# Altium PCB STM32.PcbDoc
Units mm, origin at the board's own origin, x right, y up, seen from the top; angles counter-clockwise.
Board outline 38.5 x 33.5 mm, 4 copper layers (Top Layer, L1(GND), Int2 (PWR), Bottom Layer), stack 1.482 mm thick; 35 components, 27 nets, 169 pads, 39 vias.
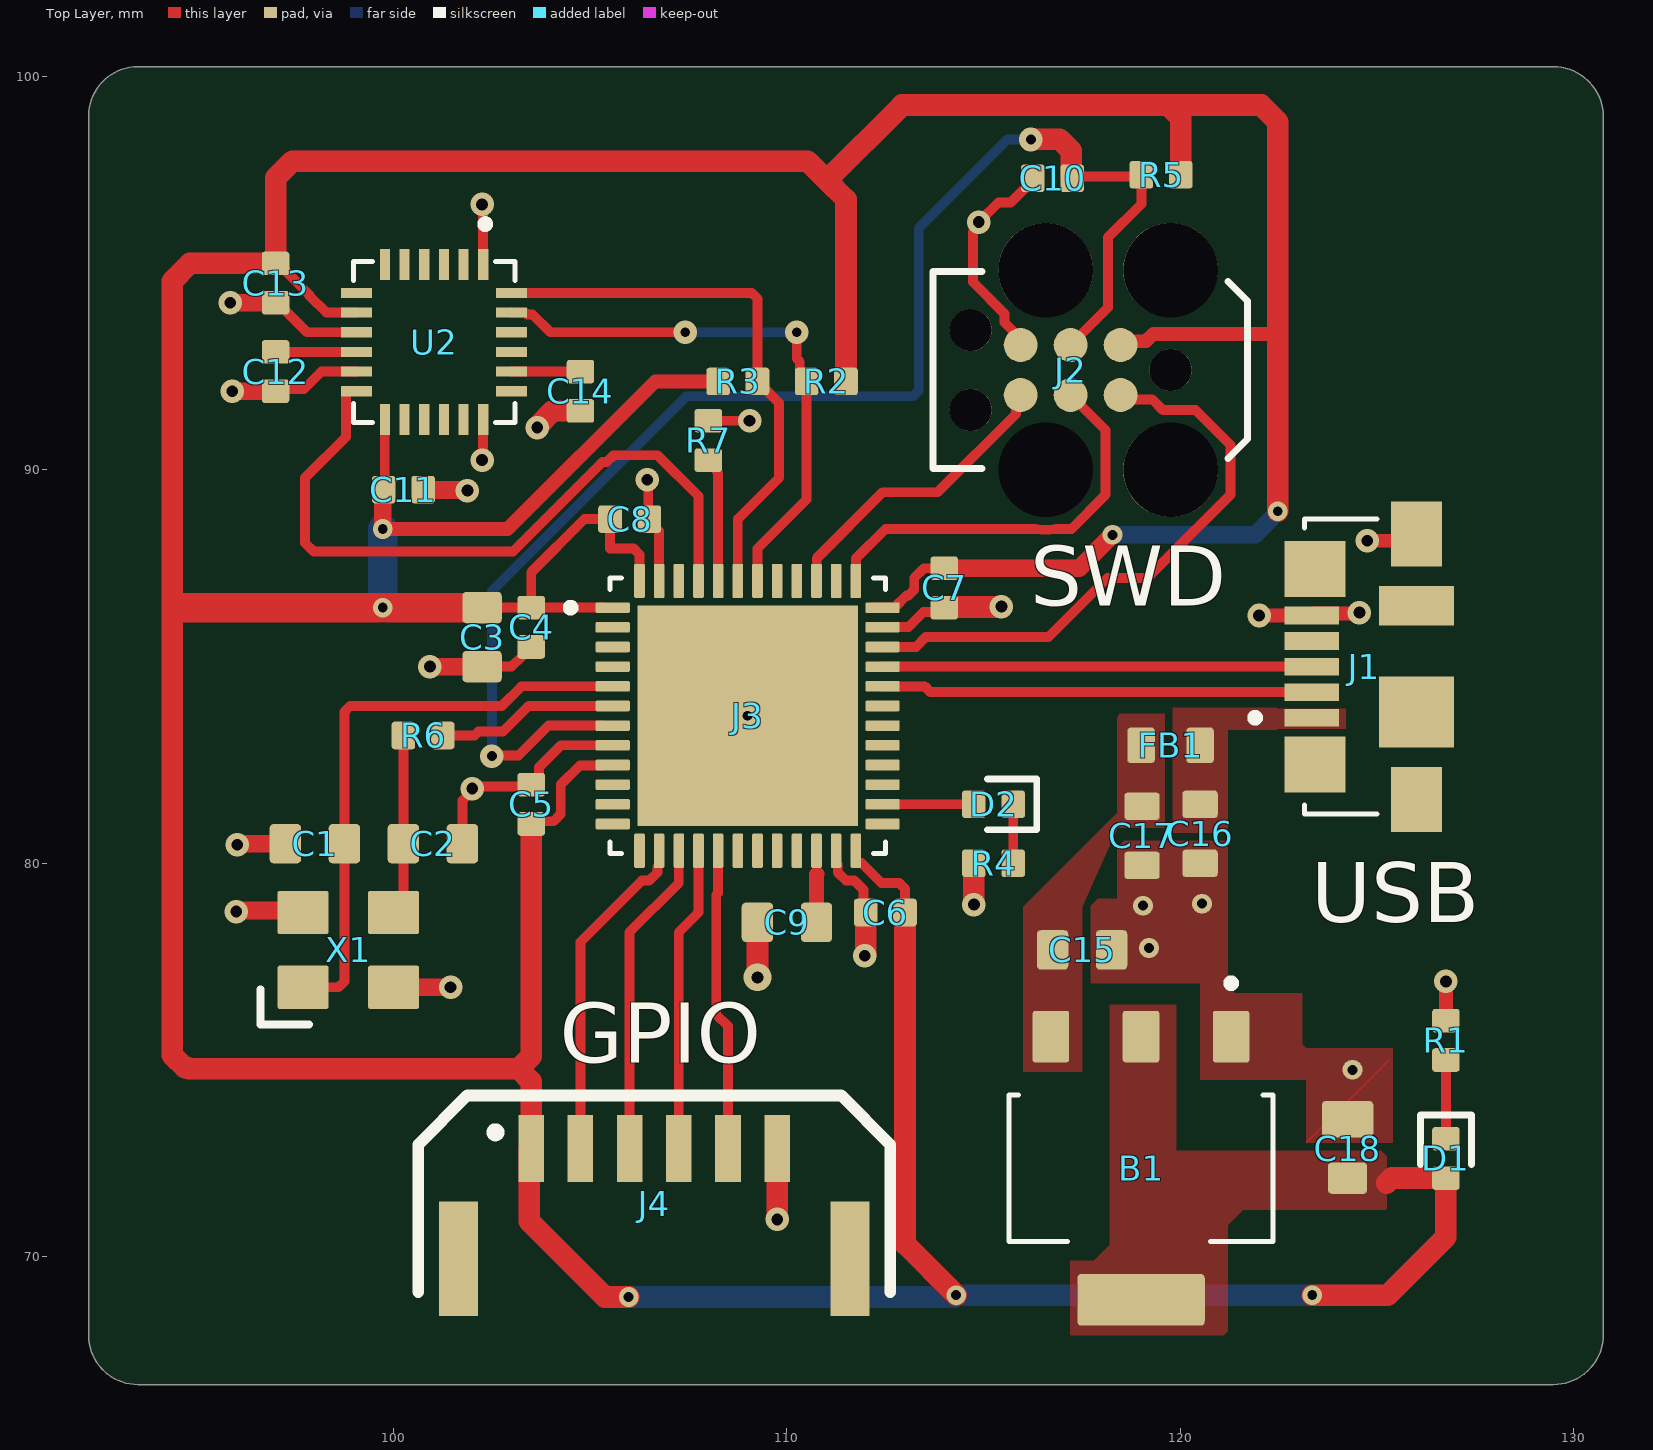
[diagram p0: Top Layer view]
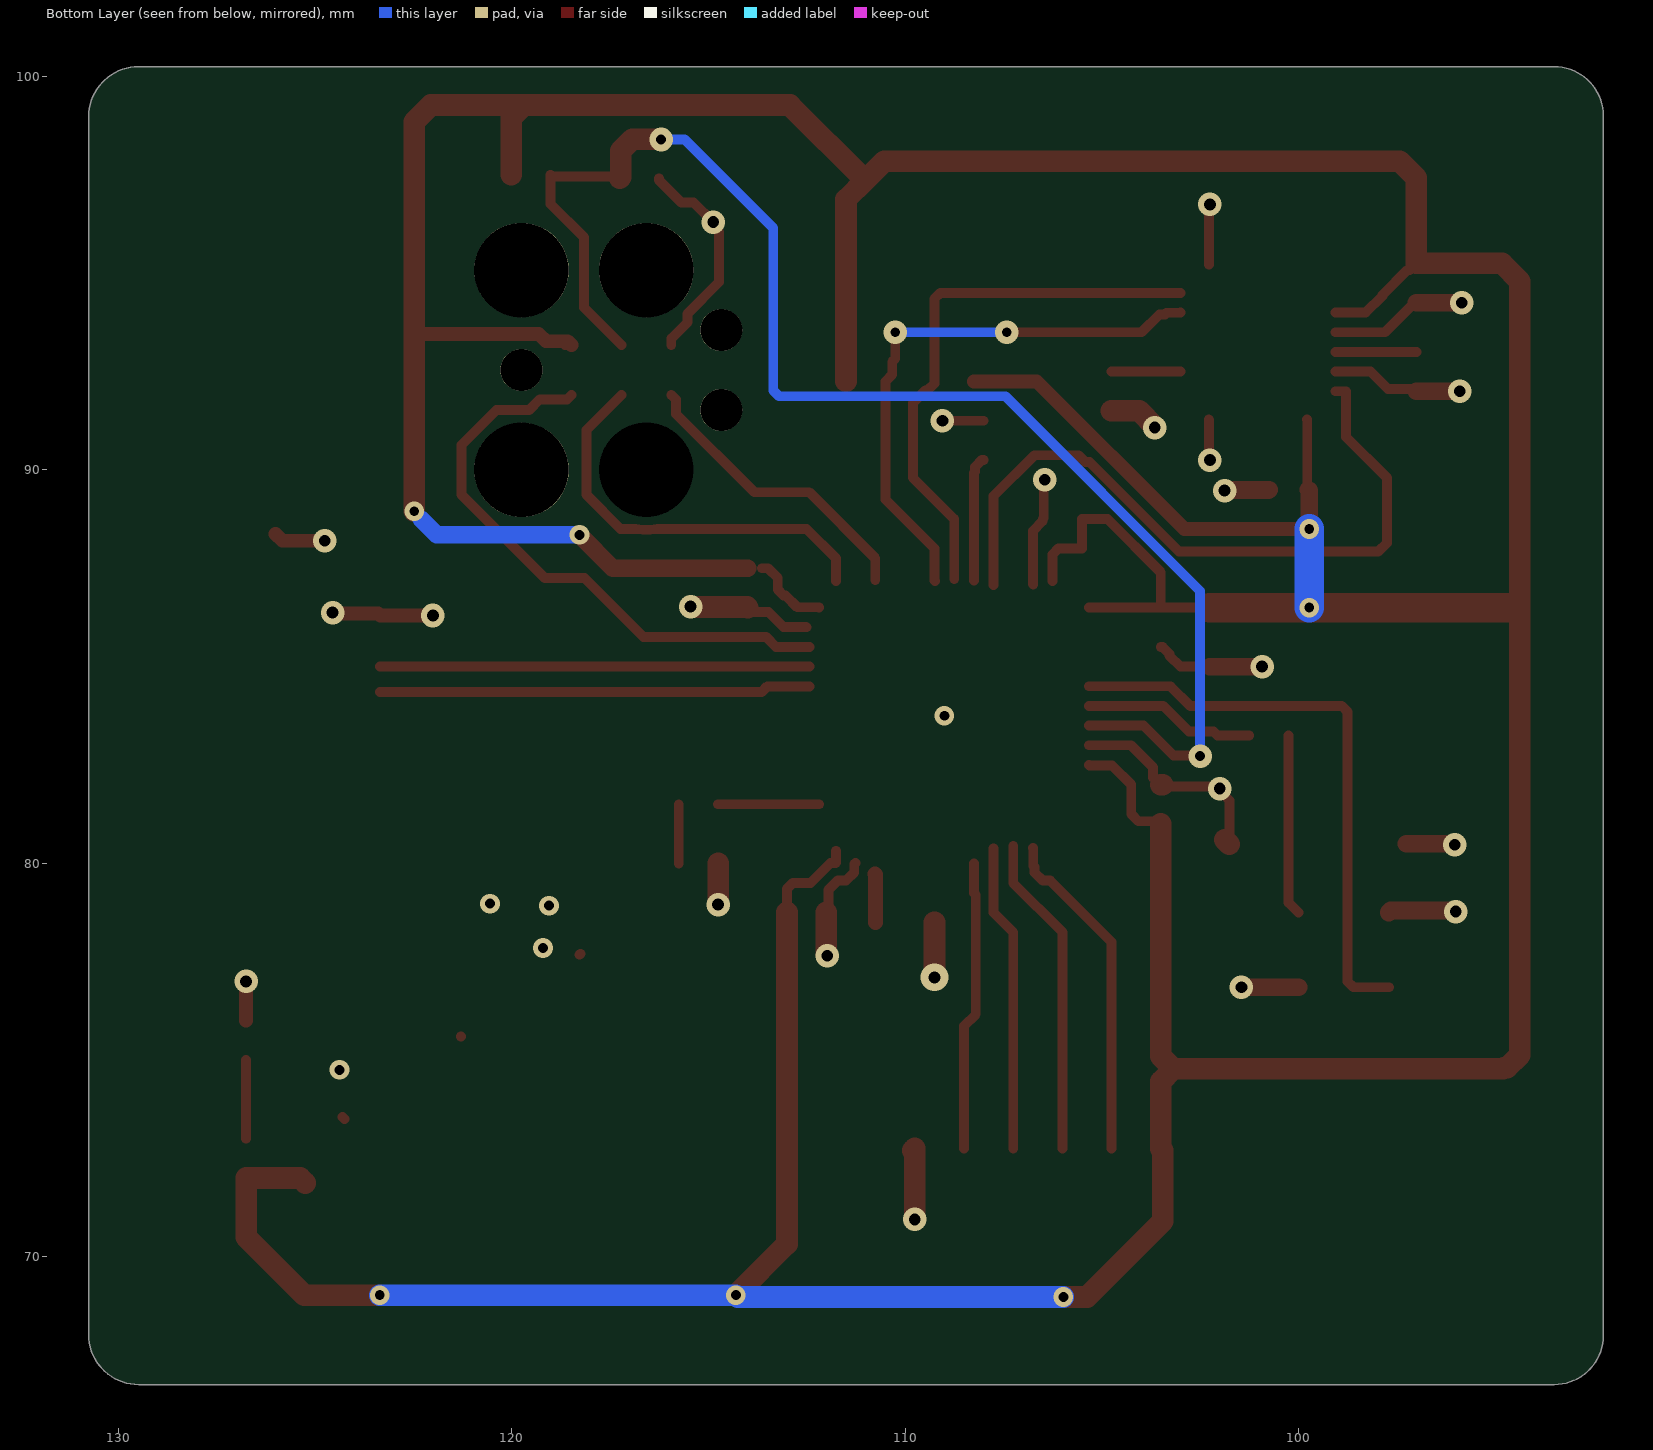
[diagram p1: Bottom Layer view, seen from below]
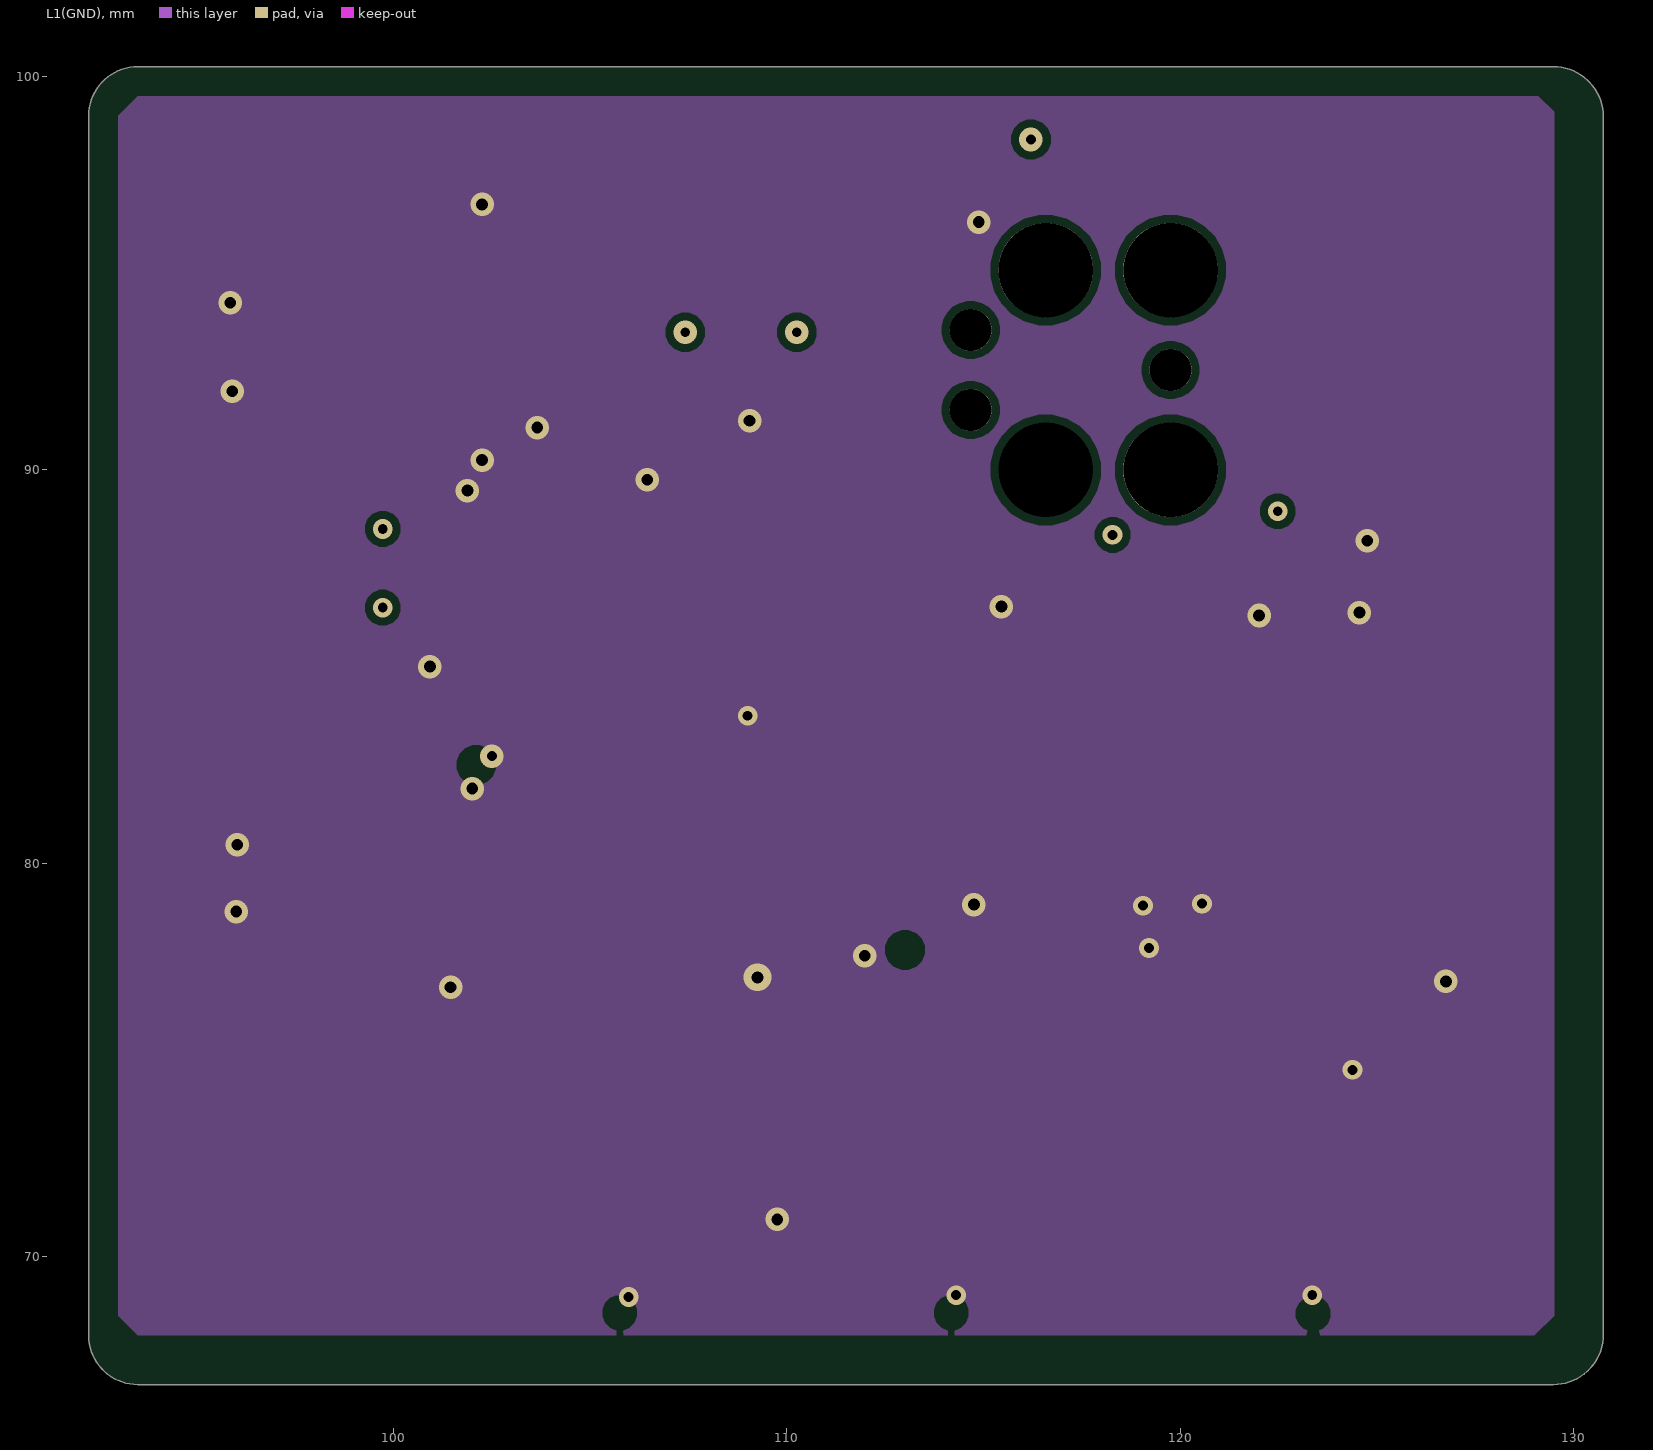
[diagram p2: L1(GND)]
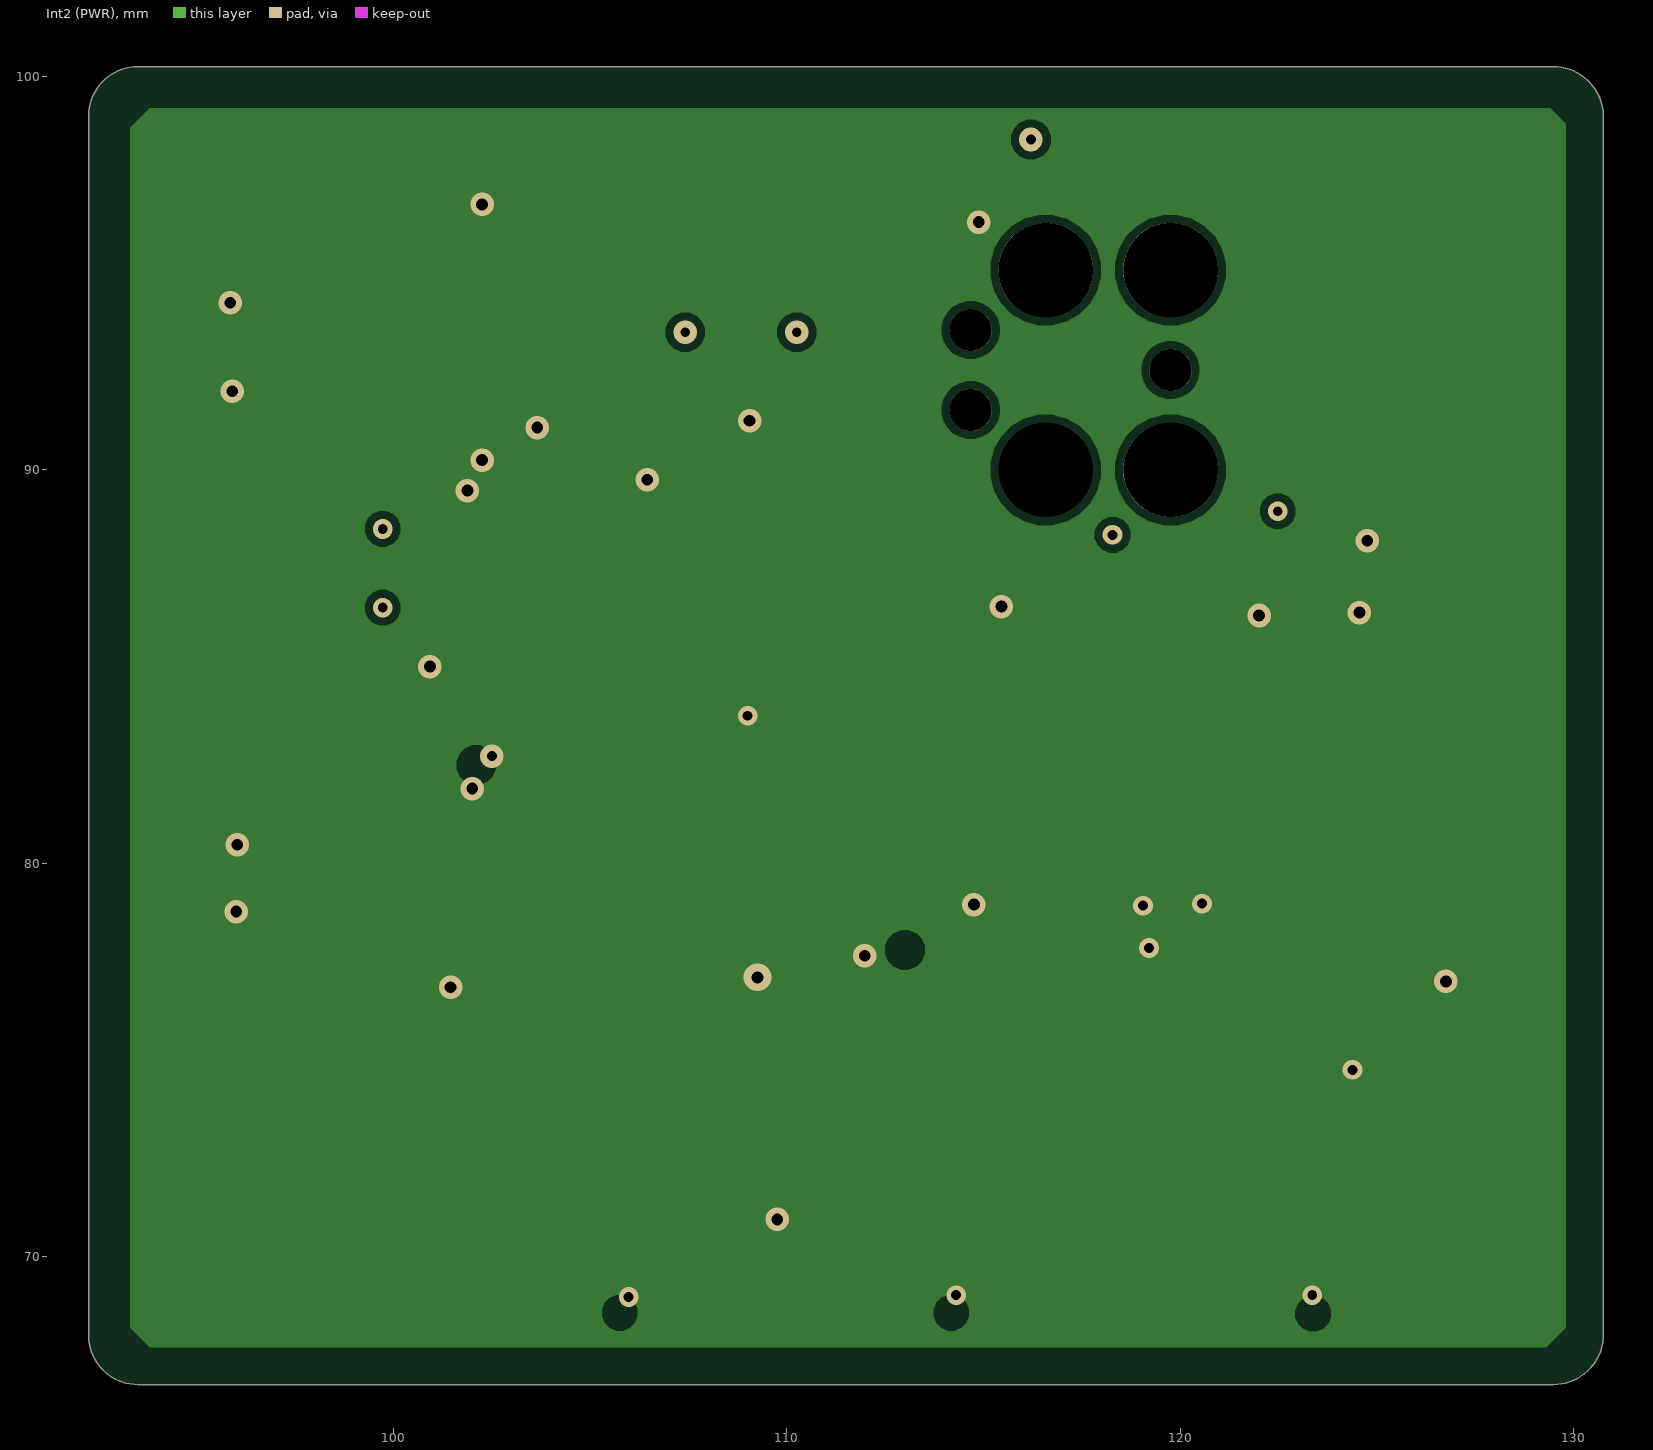
[diagram p3: Int2 (PWR)]
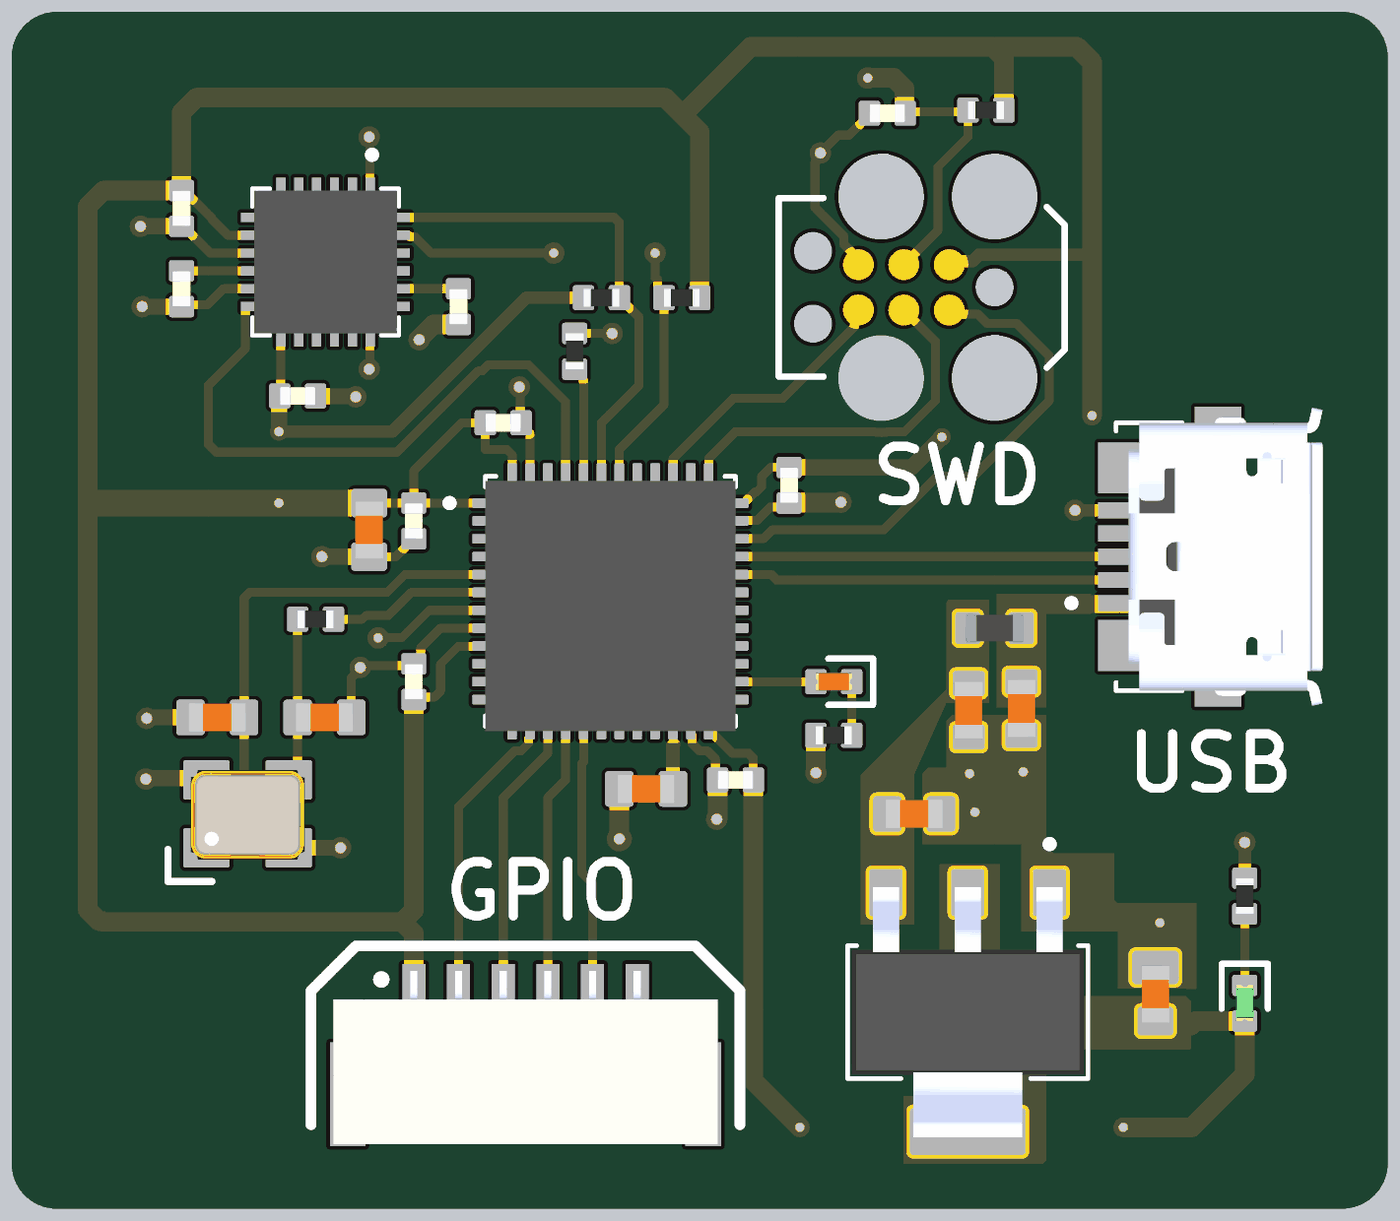
[diagram p4: 3D render of the assembled board from above, using the file's embedded part models]

## Layer stack, top to bottom
Top Solder: solder mask 0.0254, SM-001, Dk 4
Top Layer: signal copper 0.035
Dielectric 6: prepreg 0.0711, PP-006, Dk 4.1
Dielectric 1: prepreg 0.1295, PP-017, Dk 4.3
Dielectric 2: prepreg 0.1295, PP-017, Dk 4.3
L1(GND): signal copper 0.02
Dielectric 3: core 0.7112, Core-039, Dk 4.8
Int2 (PWR): signal copper 0.02
Dielectric 4: prepreg 0.1295, PP-017, Dk 4.3
Dielectric 5: prepreg 0.1295, PP-017, Dk 4.3
Dielectric 7: prepreg 0.0711, PP-006, Dk 4.1
Bottom Layer: signal copper 0.035
Bottom Solder: solder mask 0.0254, SM-001, Dk 4

## Board outline
92.25,68 ccw(c93.5,68) 93.5,66.75 129.48,66.75 ccw(c129.48,68.02) 130.75,68.02 130.75,98.98 ccw(c129.48,98.98) 129.48,100.25 93.5,100.25 ccw(c93.5,99) 92.25,99

## Design rules (kind name [scope] priority, off if disabled: settings)
Clearance [All] p1: gap=0.005 ignorepadtopadclearanceinfootprint=FALSE except(0: Arc-Hole Track-Hole SMDPad-Hole THPad-Hole Via-Hole Fill-Hole Poly-Hole Region-Hole Text-Hole)
DiffPairsRouting [All] p1: maxlimit=0.254 minlimit=0.254 mostfreqgap=0.254 toplayer_minwidth=0.381 toplayer_maxwidth=0.381 toplayer_prefwidth=0.381 midlayer1_minwidth=0.381 midlayer1_maxwidth=0.381 midlayer1_prefwidth=0.381 midlayer2_minwidth=0.381 midlayer2_maxwidth=0.381 midlayer2_prefwidth=0.381 bottomlayer_minwidth=0.381 bottomlayer_maxwidth=0.381 bottomlayer_prefwidth=0.381 maxuncoupledlength=12.7
PolygonConnect [All] p1: connectstyle=Direct reliefconductorwidth=0.254 reliefentries=4 polygonreliefangle="90 Angle" airgapwidth=0.254
RoutingVias [All] p1: holewidth=0.3 width=0.7 viastyle="Through Hole" minholewidth=0.25 minwidth=0.55 maxholewidth=0.4 maxwidth=0.9
SolderMaskExpansion [All] p1: expansion=0.102 istentingtop=FALSE
UnRoutedNet [All] p1: checkbadconnections=TRUE
Width [All] p1: maxlimit=1 minlimit=0.2 preferedwidth=0.3 midlayer1_prefwidth=0.254 midlayer2_prefwidth=0.254 minimp=50.000000 maximp=50.000000 favimp=50.000000
28 further rules are at their usual default settings.

## Classes and differential pairs
differential pair USB_D: +USB_D_P -USB_D_N

## Components (designator, comment, footprint, x,y, rotation, side; value= is the part's Value field where it differs from the comment)
B1 "AMS1117" SOT229P700X180-4N 119,72.25 r270 top
C1 "10p" CAP_0603#1 98,80.5 r0 top
C2 "10p" CAP_0603#1 101,80.5 r180 top
C3 "2.2u" CAP_0603#1 102.25,85.75 r90 top
C4 "100n" CAP_0402 103.5,86 r90 top
C5 "100n" CAP_0402 103.5,81.5 r270 top
C6 "100n" CAP_0402 112.5,78.75 r0 top
C7 "100n" CAP_0402 114,87 r90 top
C8 "100n" CAP_0402 106,88.75 r180 top
C9 "2.2u" CAP_0603#1 110,78.5 r0 top
C10 "100n" CAP_0402 116.75,97.415 r0 top
C11 "100n" CAP_0402 100.25,89.5 r180 top
C12 "100n" CAP_0402 97,92.5 r90 top
C13 "10n" CAP_0402 97,94.75 r90 top
C14 "2.2n" CAP_0402 104.75,92 r90 top
C15 "22u" CAP_0603#1 117.5,77.8 r180 top
C16 "2.2u" CAP_0603#2 120.5,80.75 r90 top
C17 "2.2u" CAP_0603#2 119.025,80.7 r90 top
C18 "22u" CAP_0603#3 124.25,72.75 r270 top
D1 "GREEN" LED_0402_GREEN 126.75,72.5 r90 top
D2 "RED" LED_0402_RED 115.25,81.5 r0 top
FB1 "120R" FB_0603 119.75,83 r180 top
J1 "" MOLEX_47346-0001 126,85 r90 top
J2 "TC2030" TC2030-FP 117.21,92.54 r180 top
J3 "STM32F411CEU6" QFN50P700X700X60-49N 109,83.75 r0 top
J4 "SM06B-GHS-TB" SM06B-GHS-TB 106.625,71.35 r0 top
R1 "1k" RES_0402 126.75,75.5 r270 top
R2 "2.2k" RES_0402 111,92.25 r180 top
R3 "2.2k" RES_0402 108.75,92.25 r0 top
R4 "1k" RES_0402 115.25,80 r0 top
R5 "10k" RES_0402 119.508,97.501 r180 top
R6 "0R" RES_0402 100.75,83.25 r0 top
R7 "10k" RES_0402 108,90.75 r90 top
U2 "" QFN50P400X400X95-24N 101.03,93.25 r270 top
X1 "24MHz" XTAL_3225 98.85,77.8 r0 top

## Footprints (in the part's own frame and the unit in brackets; to place one, negate y for a bottom-side part, rotate by r counter-clockwise, add the part's x,y. Pads: shape width x height; smd on the part's side, far side on the other; paste and mask are expansions set on the pad)
CAP_0402 [mm]
  rrect25% 0.6x0.7 smd: 1(-0.5,0) 2(0.5,0)
  body extent -0.5,-0.26 0.5,0.26, height 0.37
CAP_0603#1 [mm]
  rrect25% 0.8x1 smd: 1(-0.75,0) 2(0.75,0)
  body extent -0.8,-0.4 0.8,0.4, height 0.51
CAP_0603#2 [mm]
  rrect25% 0.7x0.9 smd: 1(-0.75,0) 2(0.75,0)
  body extent -0.8,-0.4 0.8,0.4, height 0.51
CAP_0603#3 [mm]
  rrect25% 0.93x1.31 smd: 1(-0.75,0)
  rrect25% 0.8x1 smd: 2(0.75,0)
  body extent -0.8,-0.4 0.8,0.4, height 0.51
FB_0603 [mm]
  rrect25% 0.7x0.9 smd: 1(-0.75,0) 2(0.75,0)
  body extent -0.8,-0.4 0.8,0.4, height 0.81
LED_0402_GREEN [mm]
  rrect25% 0.6x0.7 smd: A(-0.5,0) K(0.5,0)
  silkscreen extent -0.15,-0.65 1.1,0.65, body extent -0.51,-0.25 0.51,0.25, height 0.45
LED_0402_RED [mm]
  rrect25% 0.6x0.7 smd: A(-0.5,0) K(0.5,0)
  silkscreen extent -0.15,-0.65 1.1,0.65, body extent -0.51,-0.25 0.51,0.25, height 0.45
MOLEX_47346-0001 [mm]
  rect 0.45x1.38 smd: 1(-1.3,2.66) 2(-0.65,2.66) 3(0,2.66) 4(0.65,2.66) 5(1.3,2.66)
  rect 1.425x1.55 smd: S1(-2.488,2.575) S2(2.488,2.575)
  rect 1.65x1.3 smd: S3(-3.375,0) S6(3.375,0)
  rect 1.8x1.9 smd: S4(-1.15,0)
  rect 1x1.9 smd: S5(1.55,0)
  silkscreen extent -3.75,1 3.75,4.2, body extent -4.18,-2.93 4.18,2.5, height 2.7
QFN50P400X400X95-24N [mm]
  rect 0.79x0.26 smd: 1(-1.97,1.25) 2(-1.97,0.75) 3(-1.97,0.25) 4(-1.97,-0.25) 5(-1.97,-0.75) 6(-1.97,-1.25) 13(1.97,-1.25) 14(1.97,-0.75) 15(1.97,-0.25) 16(1.97,0.25) 17(1.97,0.75) 18(1.97,1.25)
  rect 0.26x0.79 smd: 7(-1.25,-1.97) 8(-0.75,-1.97) 9(-0.25,-1.97) 10(0.25,-1.97) 11(0.75,-1.97) 12(1.25,-1.97) 19(1.25,1.97) 20(0.75,1.97) 21(0.25,1.97) 22(-0.25,1.97) 23(-0.75,1.97) 24(-1.25,1.97)
  silkscreen extent -3.1,-2.05 2.05,2.05, body extent -2,-2 2,2, height 0.93
QFN50P700X700X60-49N [mm]
  rrect25% 0.87x0.27 smd: 1(-3.43,2.75) 2(-3.43,2.25) 3(-3.43,1.75) 4(-3.43,1.25) 5(-3.43,0.75) 6(-3.43,0.25) 7(-3.43,-0.25) 8(-3.43,-0.75) 9(-3.43,-1.25) 10(-3.43,-1.75) 11(-3.43,-2.25) 12(-3.43,-2.75) 25(3.43,-2.75) 26(3.43,-2.25) 27(3.43,-1.75) 28(3.43,-1.25) 29(3.43,-0.75) 30(3.43,-0.25) 31(3.43,0.25) 32(3.43,0.75) 33(3.43,1.25) 34(3.43,1.75) 35(3.43,2.25) 36(3.43,2.75)
  rrect25% 0.27x0.87 smd: 13(-2.75,-3.43) 14(-2.25,-3.43) 15(-1.75,-3.43) 16(-1.25,-3.43) 17(-0.75,-3.43) 18(-0.25,-3.43) 19(0.25,-3.43) 20(0.75,-3.43) 21(1.25,-3.43) 22(1.75,-3.43) 23(2.25,-3.43) 24(2.75,-3.43) 37(2.75,3.43) 38(2.25,3.43) 39(1.75,3.43) 40(1.25,3.43) 41(0.75,3.43) 42(0.25,3.43) 43(-0.25,3.43) 44(-0.75,3.43) 45(-1.25,3.43) 46(-1.75,3.43) 47(-2.25,3.43) 48(-2.75,3.43)
  rect 5.6x5.6 smd paste-4: 49(0,0)
  silkscreen extent -4.6,-3.5 3.5,3.5, body extent -3.5,-3.63 3.5,3.37, height 0.6
RES_0402 [mm]
  rrect25% 0.6x0.7 smd: 1(-0.5,0) 2(0.5,0)
  body extent -0.5,-0.25 0.5,0.25, height 0.3
SM06B-GHS-TB [mm]
  rect 0.65x1.7 smd: 1(-3.125,1.4) 2(-1.875,1.4) 3(-0.625,1.4) 4(0.625,1.4) 5(1.875,1.4) 6(3.125,1.4)
  rect 1x2.9 smd: ""(-4.975,-1.4) ""(4.975,-1.4)
  silkscreen extent -6,-2.25 6,2.75, body extent -5.38,-2.8 5.38,2.05, height 4.26
SOT229P700X180-4N [mm]
  rrect15% 1.31x0.93 smd: 1(-3.345,2.29) 2(-3.345,0) 3(-3.345,-2.29)
  rrect15% 1.31x3.24 smd: 4(3.345,0)
  silkscreen extent -4.8,-3.36 1.86,3.36, body extent -3.5,-3.25 3.5,3.25, height 1.8
TC2030-FP [mm]
  round 0.863 smd paste-0.432: 1(-1.27,-0.635) 2(-1.27,0.635) 3(0,-0.635) 4(0,0.635) 5(1.27,-0.635) 6(1.27,0.635)
  round 2.4 hole 2.4 unplated: MH(-2.54,2.54) MH(-2.54,-2.54) MH(0.635,-2.54)
  round 1.067 hole 1.067 unplated: MH(-2.54,0) MH(2.54,-1.016) MH(2.54,1.016)
  round 1.2 hole 2.4 unplated: MH(0.635,2.54)
  silkscreen extent -4.5,-2.5 3.5,2.5
XTAL_3225 [mm]
  rrect10% 1.3x1.1 smd: 1(-1.15,-0.95) 2(1.15,-0.95) 3(1.15,0.95) 4(-1.15,0.95)
  silkscreen extent -2.23,-1.89 -1,-1, body extent -1.6,-1.28 1.6,1.22, height 0.61

## Part data
B1: "1117", Manufacturer_Name="Advanced Monolithic Systems", Datasheet Link=https://datasheet.lcsc.com/szlcsc/Advanced-Monolithic-Systems-AMS-AMS1117-ADJ_C6188.pdf, Geometry.Height=1.8mm, Manufacturer_Part_Number=AMS1117
C1 C2 C3 C9 C15 C16 C17 C18: library part CAP_0603, "Capacitor SMD 0603"
C4 C5 C6 C7 C8 C10 C11 C12 C13 C14: library part CAP_0402, "Capacitor SMD 0402"
D1: library part LED_0402_GREEN, "LED 0402 GREEN SMD"
D2: library part LED_0402_RED, "LED 0402 RED SMD"
FB1: library part FB_0603, "Ferrite Bead SMD 0603"
J1: library part 47346-0001, "USB - micro B USB 2.0 Receptacle Connector 5 Position Surface Mount, Right Angle", Package=None, Availability="In Stock", Check_prices=https://www.snapeda.com/parts/47346-0001/Molex/view-part/?ref=eda, MF=Molex, MP=47346-0001, Price=None, Purchase-URL=https://pricing.snapeda.com/search/part/47346-0001/?ref=eda, SnapEDA_Link=https://www.snapeda.com/parts/47346-0001/Molex/view-part/?ref=snap
J2: "Tag-Connect No-Solder SWD Debug Connector DO NOT PLACE", Manufacturer=Tag-Connect, Manufacturer Part Number=TC2030
J3: library part STM32F411VET6, "IC MCU 32BIT 512KB FLASH 100LQFP", Case/Package=LQFP, Manufacturer=STMicroelectronics, Max Frequency=100MHz, Max Operating Temperature=85°C, Max Power Dissipation=465mW, Max Supply Voltage=3.6V, Min Operating Temperature=-40°C, Min Supply Voltage=1.7V, Operating Supply Voltage=3.3V, Package Quantity=540, Category=Microcontrollers, ComponentLink1Description=http://www.farnell.com/datasheets/2281762.pdf?src-supplier=Farnell, ComponentLink1URL=http://www.farnell.com/datasheets/2281762.pdf?src-supplier=Farnell, ComponentLink2Description=http://www.mouser.com/ds/2/389/stm32f411ce-956237.pdf?src-supplier=Mouser, ComponentLink2URL=http://www.mouser.com/ds/2/389/stm32f411ce-956237.pdf?src-supplier=Mouser, ComponentLink3Description=http://www.st.com/content/ccc/resource/technical/document/datasheet/b3/a5/46/3b/b4/e5/4c/85/DM00115249.pdf/files/DM00115249.pdf/jcr:content/translations/en.DM00115249.pdf?src-supplier=Digi-Key, ComponentLink3URL=http://www.st.com/content/ccc/resource/technical/document/datasheet/b3/a5/46/3b/b4/e5/4c/85/DM00115249.pdf/files/DM00115249.pdf/jcr:content/translations/en.DM00115249.pdf?src-supplier=Digi-Key, ComponentLink4Description=http://www.st.com/st-web-ui/static/active/en/resource/technical/document/datasheet/DM00115249.pdf?src-supplier=Avnet, ComponentLink4URL=http://www.st.com/st-web-ui/static/active/en/resource/technical/document/datasheet/DM00115249.pdf?src-supplier=Avnet, ComponentLink5Description=https://datasheet.octopart.com/STM32F411VET6-STMicroelectronics-datasheet-82511007.pdf?src-supplier=SHENGYU+ELECTRONICS, ComponentLink5URL=https://datasheet.octopart.com/STM32F411VET6-STMicroelectronics-datasheet-82511007.pdf?src-supplier=SHENGYU+ELECTRONICS, Core Architecture=ARM, Data Bus Width=32b, Interface=I2C,SPI,USB,IrDA,MMC,SDIO,SD,UART,USART,LIN,I2S, Lead Free="Lead Free", Manufacturer Part Number=STM32F411VET6, Memory Size=512KB, Memory Type=FLASH, Mount="Surface Mount", Number of ADC Channels=16, Number of I/Os=81, Number of Pins=100, Number of Programmable I/O=81, Number of Timers/Counters=8, Oscillator Type=Internal, Packaging=Tray, Peripherals="Brown-out Detect/Reset,POR,PWM,WDT,DMA", Pricing 1="90=5.81793, 100=5.7004, 190=5.58287, 450=5.46533, 900=5.3478, 4500=5.23026, 9000=5.11273 (USD)", Radiation Hardening=No, RAM Size=128KB, RoHS=Yes, RoHS Compliant=Yes, Series=STM32F4, Stock 1=36119, Supplier 1=Avnet, Watchdog Timer=Yes, Weight=0.04653oz
J4: "Header Connector 6 Position 1.25MM Pitch SMD Horizontal JST GH", Manufacturer=JST, Manufacturer Part Number=SM06B-GHS-TB
R1 R2 R3 R4 R5 R6 R7: library part RES_0402, "Resistor SMD 0402"
U2: library part MPU-6050, "MPU-6050 series Accelerometer, Gyroscope, 3 Axis Sensor Evaluation Board", Package="QFN-24 InvenSense", Availability="In Stock", Check_prices=https://www.snapeda.com/parts/MPU-6050/TDK+InvenSense/view-part/?ref=eda, MF="TDK InvenSense", MP=MPU-6050, Price=None, Purchase-URL=https://pricing.snapeda.com/search/part/MPU-6050/?ref=eda, SnapEDA_Link=https://www.snapeda.com/parts/MPU-6050/TDK+InvenSense/view-part/?ref=snap
X1: library part TSX-3225_24.0000MF15X-AC, "Crystal SMD 24MHz 10PPM 7pF 3225", Manufacturer=Epson, Manufacturer Part Number="TSX-3225 24.0000MF15X-AC"

## Via types
v1: diameter 0.598, hole 0.3, Top Layer to Bottom Layer, 21 vias
v2: diameter 0.5, hole 0.25, Top Layer to Bottom Layer, 12 vias
v3: diameter 0.6, hole 0.25, Top Layer to Bottom Layer, 4 vias
v4: diameter 0.598, hole 0.3, Top Layer to Bottom Layer, tented both sides, 1 vias
v5: diameter 0.7, hole 0.3, Top Layer to Bottom Layer, 1 vias

## Nets (pads, with @x,y where several pads share a name; then routed paths per layer and width w, separated by ;. In a path a pad name is that pad's centre, name@x,y a point inside that pad or via, vN(x,y) a via of type N, cw(c..) or ccw(c..) an arc to the next point about the centre after c; other vN are vias at no path point)
+3V3: B1.2 B1.4 C3.2 C4.2 C5.2 C6.2 C7.2 C8.2 C11.2 C13.2 C18.2 D1.A J2.1 J3.1 J3.9 J3.24 J3.36 J3.48 J4.1 R2.1 R3.1 R5.1 U2.8 U2.13 | length 180.6
  Top Layer w0.25: C13.2 97.175,95.075 97.241,95.075 97.865,94.45 97.865,94.425 98.29,94 U2.8 ; C11.2 99.775,89.525 99.775,91.275 U2.13 ; C3.2 C4.2 ; C5.2 103.568,81.068 104.068,81.068 104.25,81.25 104.25,82 104.74,82.49 105.31,82.49 J3.9@105.32,82.5 ; J3.1@105.32,86.5 C4.2 ; J3.48 106.25,87.854 106.104,88 105.5,88 C8.2 104.85,88.75 103.5,87.4 C4.2 ; J3.24 111.75,80.02 111.76,80.01 111.896,80.01 112.406,79.5 112.854,79.5 113,79.354 C6.2 ; J3.36@112.184,86.503 112.19,86.51 112.74,86.51 113.038,86.808 113.086,86.808 113.233,86.954 113.233,87.253 113.48,87.5 113.642,87.5 ; J2.1 J2.1@118.646,93.175
  Top Layer w0.35: v2(99.725,88.5) 102.9,88.5 106.65,92.25 R3.1 ; J2.1 118.578,93.273 119.128,93.273 119.309,93.455 122.395,93.455 122.475,93.375
  Top Layer w0.45: v2(99.725,88.5) 99.725,89.475 C11.2 ; C7.2 117.425,87.5 v2(118.275,88.35)
  Top Layer w0.55: 94.475,86.5 94.375,86.6 ; C5.2 103.5,75.097 103.178,74.775 ; v2(105.975,68.975) 105.375,68.975 103.45,70.9 103.45,72.7 J4.1 103.5,74.453 103.178,74.775 ; R2.1 111.5,96.875 111.013,97.363 ; C6.2 113,70.325 v2(114.3,69.025) ; R5.1 120.008,98.953 119.685,99.275 ; v2(122.475,88.95) 122.475,93.375 122.475,98.85 122.05,99.275 119.685,99.275 ; v2(123.35,69.025) 125.275,69.025 126.75,70.5 D1.A 125.375,72 125.25,71.875 ; 94.375,86.6 94.375,75.122 94.697,74.8 94.775,74.8 94.8,74.775 103.178,74.775 ; 94.375,86.6 94.375,94.8 94.825,95.25 C13.2 97,97.425 97.425,97.85 110.525,97.85 111.013,97.363 ; 111.013,97.363 112.925,99.275 119.685,99.275
  Top Layer w0.75: 94.475,86.5 C3.2
  Bottom Layer w0.45: v2(118.275,88.35) 121.9,88.35 122.3,88.75
  Bottom Layer w0.55: v2(105.975,68.975) 114.25,68.975 v2(114.3,69.025) v2(123.35,69.025)
  Bottom Layer w0.75: v2(99.725,86.5) v2(99.725,88.5)
+5V: B1.3 C15.2 C17.2 FB1.2
GND: B1.1 C1.1 C2.1 C3.1 C4.1 C5.1 C6.1 C7.1 C8.1 C9.1 C10.1 C11.1 C12.1 C13.1 C14.1 C15.1 C16.1 C17.1 C18.1 J1.5 J1.S6 J2.5 J3.8 J3.23 J3.35 J3.47 J3.49 J4.6 R1.1 R4.1 R7.2 U2.1 U2.9 U2.11 U2.18 X1.2 X1.4 | length 49
  Top Layer w0.249: v1(102.25,90.25) 102.275,90.275 102.275,91.275 U2.18
  Top Layer w0.25: C12.1 97.055,92.055 97.725,92.055 98.17,92.5 U2.11 ; C13.1 97.05,94.25 97.8,93.5 U2.9 ; C2.1@101.763,80.487 C2.1 101.75,81.6 102,81.85 v1(102,81.9) 102.05,81.95 103.45,81.95 C5.1 ; C3.1 103,85 103.275,85.275 103.275,85.325 103.45,85.5 C4.1 ; v1(102.25,96.75) 102.275,96.725 102.275,95.225 U2.1 ; C5.1@103.693,82.175 103.693,82.443 104.25,83 J3.8@105.32,83 ; v1(106.45,89.75) 106.475,89.725 106.475,88.775 C8.1 106.5,88.7 106.75,88.45 106.75,87.1 J3.47@106.74,87.09 ; R7.2 v1(109.05,91.25) ; J3.23@111.26,80.01 111.29,79.98 111.29,79.77 111.5,79.56 111.71,79.56 111.942,79.328 111.942,78.808 C6.1 ; J3.35@112.505,86 112.515,86.01 113.092,86.01 113.473,86.391 113.891,86.391 C7.1 ; J2.5 115.94,93.341 115.528,93.752 115.528,93.97 114.725,94.773 114.725,96.056 114.875,96.206 v1(114.875,96.3) 115.377,96.802 115.687,96.802 116.25,97.365 C10.1 ; C15.1@118.25,77.7 C15.1@118.275,77.675 ; B1.1 B1.1@121.294,75.6 ; C18.1 C18.1@124.3,73.55
  Top Layer w0.35: v1(122,86.3) 122.05,86.3 J1.5 123.39,86.35 v1@124.305,86.35 ; v1(124.75,88.2) 125.825,88.2 J1.S6 ; R1.1 126.75,76.975 v1(126.75,77)
  Top Layer w0.45: v1(95.85,94.25) C13.1 ; v1(95.9,92) C12.1 ; v4(96,78.775) 96.025,78.8 97.65,78.8 X1.4 ; v1(96.025,80.475) 96.05,80.5 C1.1 ; X1.2 101.35,76.85 v1(101.45,76.85) ; C11.1 100.763,89.487 101.863,89.487 v1(101.875,89.475) ; v1(100.925,85) C3.1
  Top Layer w0.55: C2.1@101.763,80.487 C2.1@101.875,80.6 ; v1(101.875,89.475) v1@101.888,89.475 ; C5.1@103.45,82 C5.1 ; v1(103.65,91.075) 103.65,91.1 104.05,91.5 C14.1 ; v5(109.25,77.1) C9.1 ; v1(109.75,70.95) J4.6 J4.6@109.8,72.7 ; v1(111.975,77.65) 111.975,77.663 112,77.688 C6.1 ; C7.1 114.016,86.516 115.441,86.516 v1(115.45,86.525) ; v1(114.75,78.95) R4.1
  other v1: 124.55,86.375
  other v2: 124.375,74.75 119.2,77.85 119.05,78.925 120.55,78.975 109,83.75
IMU_CPOUT: C14.2 U2.20 | length 1.7
  Top Layer w0.25: U2.20 C14.2
IMU_INT: J3.45 U2.12 | length 18.3
  Top Layer w0.25: U2.12 98.795,92 98.79,91.995 98.79,90.841 97.75,89.801 97.75,88.146 97.971,87.925 103.032,87.925 105.307,90.2 105.417,90.2 105.591,90.374 106.71,90.374 107.75,89.334 J3.45@107.75,87.074
IMU_REGOUT: C12.2 U2.10 | length 2.1
  Top Layer w0.25: C12.2 U2.10
IMU_SCL: J3.42 R2.2 U2.23 | length 14.4
  Top Layer w0.25: U2.23 103.005,93.995 103.353,93.995 103.393,93.955 103.53,93.955 103.985,93.5 v3(107.414,93.5) ; J3.42@109.24,87.18 109.25,87.19 109.25,88 110.5,89.25 R2.2 110.325,92.425 110.325,92.75 110.25,92.825 v3(110.25,93.5)
  Bottom Layer w0.25: v3(107.414,93.5) v3(110.25,93.5)
IMU_SDA: J3.43 R3.2 U2.24 | length 14.1
  Top Layer w0.25: U2.24 109.104,94.5 109.25,94.354 R3.2 109.25,92.2 109.425,92.025 109.475,92.025 109.8,91.7 109.8,89.8 108.75,88.75 J3.43@108.75,87.229
LED_PWR_K: D1.K R1.2 | length 2
  Top Layer w0.25: D1.K R1.2
"MCU OSC IN": C1.2 J3.5 X1.1 | length 14.8
  Top Layer w0.25: X1.1 98.6,76.85 98.75,77 C1.2 98.75,83.854 98.896,84 102.75,84 103.25,84.5 J3.5@105.32,84.5
"MCU OSC OUT": J3.6 R6.2 | length 4.4
  Top Layer w0.25: R6.2 102.055,83.25 102.155,83.35 102.784,83.35 103.434,84 J3.6@105.32,84
MCU_BOOT0: J3.44 R7.1 | length 3.2
  Top Layer w0.25: R7.1 108.05,90.25 108.225,90.075 108.225,89.954 108.25,89.929 J3.44@108.25,87.186
MCU_NRST: C10.2 J2.3 J3.7 R5.2 | length 36.9
  Top Layer w0.25: v3(102.5,82.725) 102.516,82.741 103.175,82.741 103.934,83.5 J3.7@105.32,83.5 ; J2.3 118.164,94.129 118.164,95.914 119.008,96.758 R5.2 118.964,97.458 117.293,97.458 C10.2
  Top Layer w0.55: v3(116.2,98.4) 116.21,98.41 116.928,98.41 117.225,98.112 117.225,97.44 C10.2
  Bottom Layer w0.25: v3(102.5,82.725) 102.5,86.925 107.449,91.874 113.204,91.874 113.35,92.021 113.35,96.15 115.6,98.4 v3(116.2,98.4)
MCU_PA4: J3.14 J4.2 | length 8.6
  Top Layer w0.25: J4.2 104.75,78 106.31,79.56 106.5,79.56 106.71,79.77 106.71,79.907 106.74,79.937 106.74,80.384 J3.14@106.75,80.394
MCU_PA5: J3.15 J4.3 | length 8.2
  Top Layer w0.25: J4.3 106,78.25 107.25,79.5 J3.15@107.25,80.439
MCU_PA6: J3.16 J4.4 | length 7.8
  Top Layer w0.25: J4.4 107.25,78.25 107.75,78.75 J3.16@107.75,80.383
MCU_PA7: J3.17 J4.5 | length 7.4
  Top Layer w0.25: J3.17@108.25,80 108.25,79.25 108.2,79.2 108.2,76.163 108.5,75.863 J4.5
MCU_SWCLK: J2.4 J3.37 | length 10.5
  Top Layer w0.25: J3.37 111.75,87.456 111.755,87.462 111.755,87.755 112.5,88.5 116.3,88.5 ccw(c116.575,90) 116.85,88.5 117.232,88.5 118.1,89.368 118.1,91.015 J2.4
MCU_SWDIO: J2.2 J3.34 | length 15
  Top Layer w0.25: J3.34 113.276,85.5 113.526,85.75 116.65,85.75 118.15,87.25 119.157,87.25 121.275,89.368 121.275,90.632 120.382,91.525 119.551,91.525 119.286,91.789 118.596,91.789 J2.2
MCU_SWO: J2.6 J3.39 | length 7.7
  Top Layer w0.25: J3.39@110.755,87.195 110.755,87.755 112.434,89.434 113.833,89.434 115.823,91.424 115.823,91.788 J2.6
MCU_VCAP1: C9.2 J3.22 | length 1.2
  Top Layer w0.381: C9.2 110.75,79.718 110.767,79.734
NetD2_A: D2.A J3.26 | length 2.6
  Top Layer w0.25: J3.26@112.18,81.5 D2.A
NetD2_K: D2.K R4.2 | length 1.5
  Top Layer w0.25: R4.2 D2.K
USB_D_N: J1.2 J3.32 | length 11
  Top Layer w0.254: J3.32 113.5,84.5 113.65,84.35 J1.2
USB_D_P: J1.3 J3.33 | length 10.9
  Top Layer w0.254: J3.33 J1.3
VBUS: C16.2 FB1.1 J1.1
"XTAL IN": C2.2 R6.1 X1.3 | length 4.6
  Top Layer w0.25: X1.3 100.25,79 C2.2 R6.1
pads on no net: J1.4 J1.S1 J1.S2 J1.S3 J1.S4 J1.S5 J2.MH J3.2 J3.3 J3.4 J3.10 J3.11 J3.12 J3.13 J3.18 J3.19 J3.20 J3.21 J3.25 J3.27 J3.28 J3.29 J3.30 J3.31 J3.38 J3.40 J3.41 J3.46 J4. U2.2 U2.3 U2.4 U2.5 U2.6 U2.7 U2.14 U2.15 U2.16 U2.17 U2.19 U2.21 U2.22

## Polygon pours and split planes (outlines as drawn)
no net on Top Layer "NONET_L01_P020" (solid, pour order 20): 123.2,72.9 125.3,75 123.2,72.9
+3V3 on Top Layer "+3V3_L01_P005" (solid, pour order 5): 117.2,69.9 117.2,68 121.1,68 121.2,68.1 121.2,70.8 121.6,71.2 125.25,71.2 125.25,72.55 125.1,72.7 119.9,72.7 119.9,76.4 118.2,76.4 118.2,70.3 117.8,69.9
GND on Top Layer "GND_L01_P021" (solid, pour order 21): 125.4,72.9 123.2,72.9 123.2,74.5 120.5,74.5 120.5,76.95 117.725,76.95 117.725,78.925 117.9,79.1 118.4,79.1 118.4,80.4 118.575,80.575 121.2,80.575 121.2,76.9 121.4,76.7 123.1,76.7 123.1,75.4 123.2,75.3 125.4,75.3
+5V on Top Layer "+5V_L01_P003" (solid, pour order 3): 118.727,81.627 116,78.9 116,74.7 117.5,74.7 117.5,78.9
VBUS on Top Layer "VBUS_L01_P000" (solid, pour order 0): 124.2,83.4 124.2,84 119.8,84 119.8,80.775 121.2,80.775 121.2,83.4
+5V on Top Layer "+5V_L01_P001" (solid, pour order 1): 119.6,83.8 118.3,83.8 118.4,83.7 118.4,80.9 119.6,80.9
GND on L1(GND) "GND_L02_P015" (solid, pour order 15): 93.5,99.5 93,99 93,68.5 93.5,68 129,68 129.5,68.5 129.5,99.1 129.1,99.5
no net on L1(GND) "NONET_L02_P011" (solid, pour order 11): 96.8,187.9 96.8,156.4 97.4,155.8 97.5,155.9 133.2,155.9 133.7,156.4 133.6,156.5 133.6,188.1
no net on L1(GND) "NONET_L02_P009" (solid, pour order 9): 86.3,175.5 86.3,144 86.9,143.4 87,143.5 122.7,143.5 123.2,144 123.1,144.1 123.1,175.7
no net on L1(GND) "NONET_L02_P008" (solid, pour order 8): 93.1,174.7 93.1,143.2 93.7,142.6 93.8,142.7 129.5,142.7 130,143.2 129.9,143.3 129.9,174.9
GND on Int2 (PWR) "GND_L03_P016" (solid, pour order 16): 93.8,99.2 93.3,98.7 93.3,68.2 93.8,67.7 129.3,67.7 129.8,68.2 129.8,98.8 129.4,99.2
GND on Int2 (PWR) "GND_L03_P010" (solid, pour order 10): 87.8,195.9 87.8,164.4 88.4,163.8 88.5,163.9 124.2,163.9 124.7,164.4 124.6,164.5 124.6,196.1

## Silkscreen, mask and mechanical layers (free items; w line width, h text height)
Top Overlay:
  text "SWD" at 116.179,86.554 h1.52
  text "USB" at 123.329,78.504 h1.52
  text "GPIO" at 104.229,74.929 h1.52
Mechanical 1:
  lines w1.2: 25.4,25.4 25.4,127 177.8,127 177.8,25.4 25.4,25.4
Mechanical 15:
  lines w0.2: 92.25,68 ccw(c93.5,68) 93.5,66.75 ; 92.25,99 cw(c93.5,99) 93.5,100.25 ; 129.48,66.75 ccw(c129.48,68.02) 130.75,68.02 ; 129.48,100.25 cw(c129.48,98.98) 130.75,98.98

## Text inside footprints (layer, text, board x,y; h text height)
D1: Mechanical 13 "+" at 126.241,70.617 h0.5 r90
D2: Mechanical 13 "+" at 113.367,82.008 h0.5
J1: Mechanical 13 "PCB EDGE" at 127.25,89.5 h0.41 r90